# Altium PCB LB - PCB Route Sem a malha de terra.PcbDoc
Units mm, origin at the board's own origin, x right, y up, seen from the top; angles counter-clockwise.
Board outline 38.5 x 63 mm, 2 copper layers (Top Layer, Bottom Layer); 60 components, 39 nets, 188 pads, 49 vias.
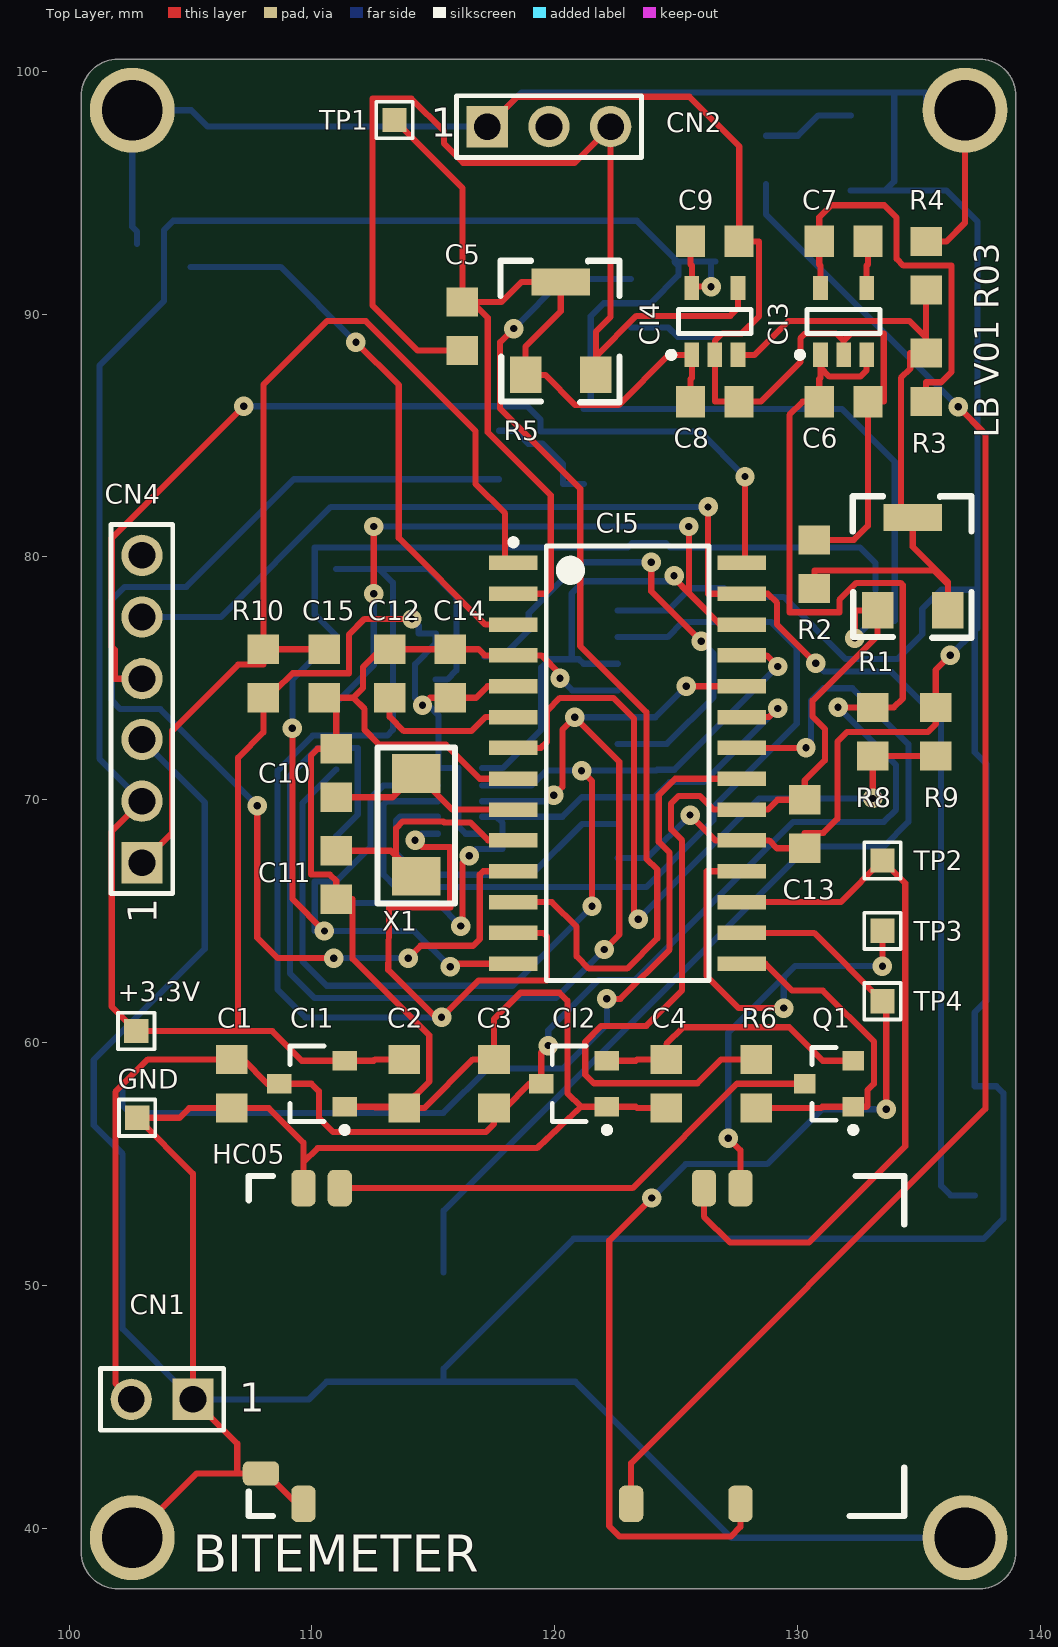
[diagram p0: Top Layer view]
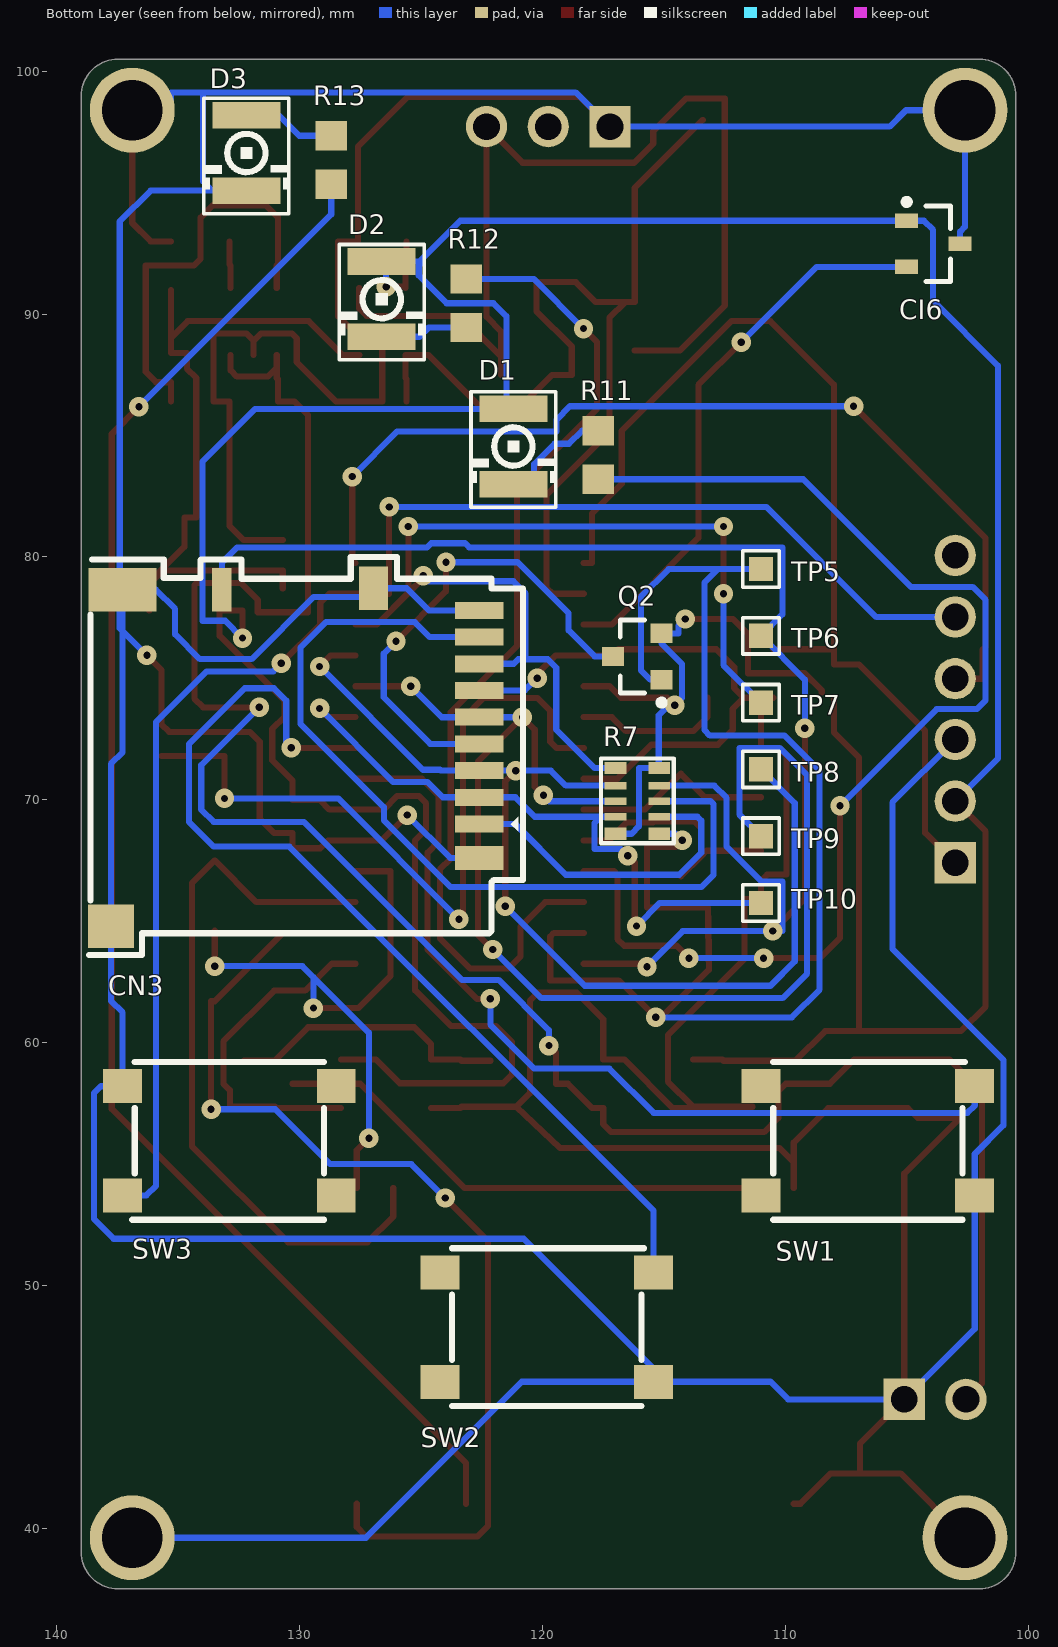
[diagram p1: Bottom Layer view, seen from below]

## Layer stack, top to bottom
Top Solder: solder mask 0.0102, Solder Resist, Dk 3.5
Top Layer: signal copper 0.0356
Dielectric1: dielectric 0.32, FR-4, Dk 4.8
Bottom Layer: signal copper 0.0356
Bottom Solder: solder mask 0.0102, Solder Resist, Dk 3.5

## Board outline
139,99 ccw(c137.5,99) 137.5,100.5 102,100.5 ccw(c102,99) 100.5,99 100.5,39 ccw(c102,39) 102,37.5 137.5,37.5 ccw(c137.5,39) 139,39 139,99

## Design rules (kind name [scope] priority, off if disabled: settings)
Clearance [All] p1: gap=0.254
PolygonConnect [All] p1: connectstyle=Relief reliefconductorwidth=0.254 reliefentries=4 polygonreliefangle="90 Angle" airgapwidth=0.254
RoutingVias [All] p1: holewidth=0.3 width=0.8 viastyle="Through Hole" minholewidth=0.3 minwidth=0.8 maxholewidth=0.3 maxwidth=0.8
SolderMaskExpansion [All] p1: expansion=0.102
UnpouredPolygon [All] p1: allowunpoured=FALSE
Width [All] p1: maxlimit=0.254 minlimit=0.254 preferedwidth=0.254
29 further rules are at their usual default settings.

## Classes and differential pairs
component class "LB - Supply": +3.3V C1 C2 C3 C4 C5 C6 C7 C8 C9 CI1 CI2 CI3 CI4 CN1 CN2 GND R1 R2 R3 R4 R5 TP1
component class "LB - MainBoard": C10 C11 C12 C13 C14 C15 CI5 CI6 CN3 CN4 D1 D2 D3 HC05 Q1 Q2 R6 R7 R8 R9 R10 R11 R12 R13 SW1 SW2 SW3 TP2 TP3 TP4 TP5 TP6 TP7 TP8 TP9 TP10 X1

## Components (designator, comment, footprint, x,y, rotation, side; value= is the part's Value field where it differs from the comment)
+3.3V "TP" TPSMD 102.765,60.469 r90 top
C1 "1uF" R0805 106.7,58.3 r90 top
C2 "1uF" R0805 113.8,58.3 r90 top
C3 "4.7uF" R0805 117.5,58.3 r270 top
C4 "1uF" R0805 124.6,58.3 r90 top
C5 "0.1uF" R0805 116.2,89.5 r270 top
C6 "1uF" R0805 131.9,86.4 r0 top
C7 "4.7uF" R0805 131.9,93 r180 top
C8 "47pF" R0805 126.6,86.4 r180 top
C9 "0.1uF" R0805 126.6,93 r180 top
C10 "22pF" R0805 111,71.1 r90 top (schematic designator C5)
C11 "22pF" R0805 111,66.9 r270 top (schematic designator C6)
C12 "10uF" R0805 113.2,75.2 r270 top (schematic designator C7)
C13 "0.1uF" R0805 130.3,69 r90 top
C14 "0.1uF" R0805 115.7,75.2 r270 top
C15 "0.1uF" R0805 110.5,75.2 r90 top (schematic designator C10)
CI1 "MCP1754S" "SOT23-A MCP1754" 110,58.3 r180 top
CI2 "MCP1754S" "SOT23-A MCP1754" 120.8,58.3 r180 top
CI3 "LP2983AIM5-1.0" "SOT23-5 Amp Op" 131.9,89.7 r90 top
CI4 "MCP6441" "SOT23-5 Amp Op" 126.6,89.7 r90 top
CI5 "PIC18F27J13" PIC24F16KL402 123,71.5 r0 top (schematic designator CI3)
CI6 "MCP9700A" MCP9700A 103.9,92.9 r180 bottom (schematic designator CI4)
CN1 "Header 2" HDR1X2 105.1,45.3 r180 top
CN2 "Header 3" HDR1X3 117.225,97.725 r0 top
CN3 "DM3AT-SF-PEJM5" DM3AT 122.5,69 r270 bottom
CN4 "Header 6" HDR1X6 103,67.4 r90 top
D1 "Red" LTST-C930 121.2,84.55 r180 bottom
D2 "Yellow" LTST-C930 126.624,90.617 r180 bottom
D3 "Blue" LTST-C930 132.199,96.639 r180 bottom
GND "TP" TPSMD 102.8,56.9 r90 top
HC05 "JY-MCU HC-05" "JY-MCU HC-05" 107.9,54 r270 top
Q1 "DMP2305U-7" DMP2305U-7 131.3,58.3 r180 top
Q2 "DMP2305U-7" DMP2305U-7 116.1,75.9 r0 bottom
R1 "200k" 3364X-1-503E 133.3,77.8 r0 top
R2 "470" R0805 130.7,79.7 r90 top
R3 "17.4k" R0805 135.3,87.4 r270 top
R4 "10.0k" R0805 135.3,92 r270 top
R5 "200k" 3364X-1-503E 118.8,87.5 r0 top (schematic designator R3)
R6 "10k" R0805 128.3,58.3 r90 top (schematic designator R1)
R7 "4k7x8 Bus" "MMR15 Mod" 117,68.6 r90 bottom (schematic designator R2)
R8 "17.4k" R0805 133.1,72.8 r90 top (schematic designator R4)
R9 "10.0k" R0805 135.7,72.8 r270 top (schematic designator R5)
R10 "10k" R0805 108,75.2 r270 top
R11 "470" R0805 117.7,84.2 r270 bottom (schematic designator R7)
R12 "470" R0805 123.15,90.45 r90 bottom (schematic designator R8)
R13 "470" R0805 128.7,96.35 r270 bottom (schematic designator R9)
SW1 "" "Push Button2" 102.2,53.7 r0 bottom
SW2 "" "Push Button2" 115.425,46.025 r0 bottom
SW3 "" "Push Button2" 137.3,58.2 r180 bottom
TP1 "TP" TPSMD 113.4,98 r90 top
TP2 "TP" TPSMD 133.5,67.5 r0 top
TP3 "TP" TPSMD 133.5,64.6 r0 top
TP4 "TP" TPSMD 133.5,61.7 r0 top
TP5 "TP" TPSMD 111,79.5 r270 bottom
TP6 "TP" TPSMD 111,76.75 r270 bottom
TP7 "TP" TPSMD 111,74 r270 bottom
TP8 "TP" TPSMD 111,71.25 r270 bottom
TP9 "TP" TPSMD 111,68.5 r270 bottom
TP10 "TP" TPSMD 111,65.75 r270 bottom
X1 "20.000Hz" ABM3 114.3,70.8 r270 top

## Footprints (in the part's own frame and the unit in brackets; to place one, negate y for a bottom-side part, rotate by r counter-clockwise, add the part's x,y. Pads: shape width x height; smd on the part's side, far side on the other; paste and mask are expansions set on the pad)
3364X-1-503E [mm] "Trimpot 50k"
  rect 1.3x1.5 smd: 1(0,0) 3(2.9,0)
  rect 2.4x1.1 smd: 2(1.45,3.825)
  silkscreen extent -1.02,-1.13 3.87,4.7, body extent -1,-1 4.2,5.2, height 1.5
ABM3 [mm] "Crystal 20.000MHz"
  rect 1.6x2 smd: 1(-0.275,0) 2(3.95,0)
  silkscreen extent -1.35,-1.6 5.08,1.6, body extent -1.05,-1.48 4.75,1.48, height 1.3
DM3AT [mm]
  rect 0.7x2 smd: 1(0,-0.1) 2(-1.1,-0.1) 3(-2.2,-0.1) 4(-3.3,-0.1) 5(-4.4,-0.1) 6(-5.5,-0.1) 7(-6.6,-0.1) 8(-7.7,-0.1) 9(-8.8,-0.1)
  rect 1.8x0.8 smd: 10(-9.65,-10.71)
  rect 1.8x1.2 smd: 11(-9.71,-4.47)
  rect 1.8x2.8 smd: 12(-9.65,-14.8)
  rect 1.8x1.9 smd: 13(4.21,-15.28)
  rect 1x2 smd: 14(1.4,-0.1)
  silkscreen extent -11,-16.18 5.4,1.7, body extent -9.71,-16.19 4.14,-0.04, height 1.68
DMP2305U-7 [mm] "SOT23, 3-Leads, Body 2.90x2.45mm, Pitch 0.95mm, IPC Medium Density"
  rect 0.9x0.8 smd: D(1,0) G(-1,0.95) S(-1,-0.95)
  silkscreen extent -1.13,-1.5 0.7,2.02, body extent -0.7,-1.5 0.7,1.5, height 1.1
HDR1X2 [mm] "Connector; Header; 2 Position"
  rect 1.7x1.7 hole 1.1: 1(0,0)
  round 1.7 hole 1.1: 2(2.54,0)
  silkscreen extent -1.27,-1.27 3.81,1.27, body extent -1.27,-3.17 3.81,2.67, height 10.02
HDR1X3 [mm] "Connector; Header; 3 Position"
  rect 1.7x1.7 hole 1.1: 1(0,0)
  round 1.7 hole 1.1: 2(2.54,0) 3(5.08,0)
  silkscreen extent -1.27,-1.27 6.35,1.27, body extent -1.27,-0.34 6.35,10.71, height 5.87
HDR1X6 [mm] "Connector; Header; 6 Position"
  rect 1.7x1.7 hole 1.1: 1(0,0)
  round 1.7 hole 1.1: 2(2.54,0) 3(5.08,0) 4(7.585,0) 5(10.125,0) 6(12.665,0)
  silkscreen extent -1.27,-1.27 13.94,1.27, body extent -1.26,-1.78 13.98,1.78, height 8.64
"JY-MCU HC-05" [mm] "Modulo Bluetooth HC-0x"
  rrect50% 1.5x1 smd: 1(0,19.75) 2(0,18.25) 12(0,3.25) 13(0,1.75) 22(13,1.75) 31(13,15.25) 34(13,19.75)
  rrect50% 1x1.5 smd: 21(11.75,0)
  silkscreen extent -0.5,-0.5 13.5,26.5, body extent 0,0 13,26, height 2
LTST-C930 [mm] "LED LITE-ON LTST-C930"
  rect 2.8x1.1 smd: A(0,1.55) K(0,-1.55)
  silkscreen extent -1.75,-2.5 1.75,2.25, body extent -1.23,-1.54 1.23,1.54, height 2.4
MCP9700A [mm] "Sensor de temperatura"
  rect 0.95x0.6 smd: 1(-1.1,0.95) 2(-1.1,-0.95) 3(1.1,0)
  silkscreen extent -1.23,-1.55 0.7,1.85, body extent -0.7,-1.52 0.7,1.53, height 1.12
"MMR15 Mod" [mm]
  rect 0.5x0.9 smd: 1(0,-1.81) 5(2.705,-1.81) 6(2.705,0) 10(0,0)
  rect 0.32x0.9 smd: 2(0.7,-1.81) 3(1.34,-1.81) 4(1.98,-1.81) 7(1.98,0) 8(1.34,0) 9(0.7,0)
  silkscreen extent -0.39,-2.4 3.1,0.59, body extent 0.03,-1.95 2.73,-0.05, height 0.55
PIC24F16KL402 [mm] "SOIC, 28-Leads, Body 17.90x7.50mm, Pitch 1.27mm, IPC Medium Density"
  rect 2x0.6 smd: 1(-4.7,8.255) 2(-4.7,6.985) 3(-4.7,5.715) 4(-4.7,4.445) 5(-4.7,3.175) 6(-4.7,1.905) 7(-4.7,0.635) 8(-4.7,-0.635) 9(-4.7,-1.905) 10(-4.7,-3.175) 11(-4.7,-4.445) 12(-4.7,-5.715) 13(-4.7,-6.985) 14(-4.7,-8.255) 15(4.7,-8.255) 16(4.7,-6.985) 17(4.7,-5.715) 18(4.7,-4.445) 19(4.7,-3.175) 20(4.7,-1.905) 21(4.7,-0.635) 22(4.7,0.635) 23(4.7,1.905) 24(4.7,3.175) 25(4.7,4.445) 26(4.7,5.715) 27(4.7,6.985) 28(4.7,8.255)
  silkscreen extent -4.82,-8.95 3.35,9.23, body extent -3.75,-8.95 3.75,8.95, height 2.65
"Push Button2" [mm]
  rect 1.6x1.4 smd: 1(0,0) 2(0,-4.5) 3(8.8,0) 4(8.8,-4.5)
  silkscreen extent 0.4,-5.5 8.3,1, body extent -0.6,-5.2 9.4,0.8, height 7.1
R0805 [mm] "Molded Resistor, 2-Leads, Body 2.00x1.25mm, IPC Medium Density"
  rect 1.2x1.3 smd: 1(-1,0) 2(1,0)
  body extent -1.05,-0.63 1.05,0.63, height 0.6
"SOT23-5 Amp Op" [mm] "Amp Op"
  rect 1x0.6 smd: 1(-1.375,0.95) 2(-1.375,0) 3(-1.375,-0.95) 4(1.375,-0.95) 5(1.375,0.95)
  silkscreen extent -1.5,-1.5 0.5,1.92, body extent -0.88,-1.5 0.87,1.5, height 1.45
"SOT23-A MCP1754" [mm] "MCP1754"
  rect 1x0.8 smd: 1(-1.35,0.95) 2(-1.35,-0.95) 3(1.35,0)
  silkscreen extent -1.48,-1.55 0.9,2.02, body extent -0.9,-1.55 0.9,1.55, height 1.1
TPSMD [mm] "Test Point SMD"
  rect 1x1 smd: 1(0,0)
  silkscreen extent -0.75,-0.75 0.75,0.75

## Part data
+3.3V GND TP1 TP2 TP3 TP4 TP5 TP6 TP7 TP8 TP9 TP10: "Test Point"
C1 C3 C7: library part C, "Capictor Cerâmico 4.7uFx16V"
C2 C4 C6: library part C, "Capictor Cerâmico 1uFx16V"
C5 C8 C9 C13 C14 C15: library part C, "Capacitor 0.1uFx25V"
C10 C11: library part C, "Capacitor 22pF"
C12: library part C, "Capacitor 10uFx6.3V"
CI1 CI2: library part "Regulador 3.3V - SOT223-3, 4-Leads, Body 6.50x7.00mm (avg), Pitch 2.30mm, IPC Medium_1", "Regulador 3.3V MCP1754S"
CI3: library part "Regulador 1.0V - SOT23-5", "Regulador 1.0V"
CI4: library part "Amp Op", "Amp Op Rail-to-Rail"
CI5: "PIC18 8Bits"
CI6: "Sensor de temperatura"
CN1: library part "Conector Alimentação", "Header, 2-Pin"
CN2: library part "Conector Sensor", "Header, 3-Pin"
CN3: library part "MicroSD - DM3CS-SF", "Slot Micro SD - Push-Pull"
CN4: library part "Conector Programação", "Header, 6-Pin"
D1 D2 D3: library part LED, "LED"
HC05: "Modulo Bluetooth HC-05"
Q1 Q2: library part "MOSFET-P DIODE", "MOSFET-P"
R1 R5: library part Trimpot, "Trimpot 200k"
R2 R3 R4 R6 R8 R9 R10 R11 R12 R13: library part R
R7: library part "R ARRAY BUS 8 - 10 PIN", "Brigde 4k7x8"
SW1 SW2 SW3: library part "Push button", "Push Button"
X1: library part XTAL, "Crystal 20.000Hz"

## Free pads (board coordinates)
  round 3.5 hole 2.5: 1(102.6,98.4) 2(136.9,98.4) 3(102.6,39.6) 3(136.9,39.6)

## Via types
v1: diameter 0.8, hole 0.3, Top Layer to Bottom Layer, 49 vias

## Nets (pads, with @x,y where several pads share a name; then routed paths per layer and width w, separated by ;. In a path a pad name is that pad's centre, name@x,y a point inside that pad or via, vN(x,y) a via of type N, cw(c..) or ccw(c..) an arc to the next point about the centre after c; other vN are vias at no path point)
+3.3VCC: +3.3V.1 C2.2 C9.2 C13.2 C14.2 CI1.2 CI4.5 CI5.5 CI5.20 CI6.1 CN4.2 D1.A D2.A Q2.S R1.1 R6.2 R7.5 R7.10 R10.2 | length 183.3
  Top Layer w0.254: CN4.2 101.752,68.692 101.752,61.482 +3.3V.1 108.365,60.469 109.584,59.25 CI1.2 112.547,59.25 112.597,59.3 C2.2 ; 106.959,60.528 106.959,71.73 108,72.771 R10.2 ; R10.2@108.5,74.412 108.5,74.5 109.209,75.209 111.531,75.209 111.531,76.81 112.166,77.445 v1(114.122,77.445) ; v1(114.554,73.889) 114.865,74.2 C14.2 116.764,74.2 117.239,74.675 CI5.5 ; C9.2 125.6,92.049 125.65,91.999 CI4.5@125.65,91.135 ; CI4.5 CI4.5@125.65,91.135 ; v1(126.441,91.135) CI4.5@125.65,91.135 ; R6.2 126.864,59.3 125.882,58.318 121.615,58.318 121.26,58.674 121.26,60.02 121.92,60.681 123.774,60.681 125.247,62.154 125.247,68.326 124.797,68.777 124.797,69.85 125.101,70.155 125.983,70.155 126.543,69.595 CI5.20 128.778,69.595 129.183,70 C13.2 130.3,70.794 131.134,71.628 131.134,72.917 130.626,73.425 130.626,74.081 133.3,76.755 R1.1 132.359,77.8 v1(132.359,76.657)
  Bottom Layer w0.254: CN4.2 101.244,71.696 101.244,87.884 103.911,90.551 103.911,93.472 104.289,93.85 CI6.1 123.387,93.85 125.07,92.167 ; v1(114.122,77.445) 114.402,77.165 114.402,76.85 Q2.S 115.1,76.441 114.249,75.59 114.249,74.193 v1(114.554,73.889) 114.808,73.889 115.214,73.482 R7.5@115.214,71.305 ; R7.5 R7.5@115.214,71.305 ; R7.10 116.332,68.6 116.027,68.905 116.027,71.305 R7.5@115.214,71.305 ; D1.A D1.A@121.488,86.1 ; v1(126.441,91.135) D2.A@126.441,92.167 ; D2.A D2.A@126.441,92.167 ; v1(132.359,76.657) 133.071,77.369 134.01,77.369 134.01,83.922 131.832,86.1 D1.A@121.488,86.1 ; D1.A@121.488,86.1 121.488,89.916 122.022,90.449 123.952,90.449 125.1,91.597 125.1,92 124.933,92.167 125.07,92.167 ; 125.07,92.167 D2.A@126.441,92.167
"+3.3VCC BT": C4.2 CI2.2 Q1.S | length 11.7
  Top Layer w0.254: CI2.2 123.342,59.25 123.392,59.3 C4.2 124.6,59.944 125.286,60.63 129.66,60.63 131.04,59.25 Q1.S
GND: C1.1 C2.1 C3.1 C4.1 C6.2 C8.1 C9.1 C10.2 C11.2 C12.1 C13.1 C14.1 C15.1 CI1.1 CI2.1 CI3.2 CI4.2 CI5.4 CI5.8 CI5.19 CI6.3 CN1.1 CN2.1 CN3.6 CN3.9 CN3.11 CN3.12 CN3.13 CN3.14 CN4.3 D3.K GND.1 HC05.13 HC05.21 HC05.22 pad.1 pad.2 pad.3 R2.2 R4.1 R9.1 SW1.1 SW2.1 SW3.1 | length 394.8
  Top Layer w0.254: pad.3@102.6,39.6 105.25,42.25 106.924,42.25 ; HC05.22 109.378,41 108.128,42.25 HC05.21 106.924,42.25 ; HC05.13 109.65,55.065 ; C15.1 C15.1@111,74.2 ; CN2.1 118.458,98.958 125.552,98.958 127.6,96.911 C9.1 128.422,93 128.422,89.916 127.712,89.206 126.906,89.206 126.6,88.9 CI4.2 126.6,86.4 C8.1 128.499,86.4 130.124,88.026 130.124,89.002 130.329,89.206 131.594,89.206 131.9,88.9 ; CI5.8 116.916,70.865 115.518,72.263 112.776,72.263 112.166,72.873 112.166,73.738 111.705,74.2 ; v1(120.218,75.008) 120.218,75.184 119.457,75.945 CI5.4 117.12,75.945 116.865,76.2 C14.1 C12.1 112.846,76.2 112.102,75.457 112.102,74.598 111.705,74.2 ; C4.1 123.392,57.3 123.342,57.35 CI2.1 121.085,57.35 ; v1(125.578,69.367) 126.62,68.325 CI5.19 128.829,68.325 129.154,68 C13.1 130.3,68.631 131.064,68.631 131.648,69.215 131.648,72.39 132.055,72.796 135.382,72.796 135.7,73.114 R9.1 135.7,75.35 v1(136.296,75.946) ; R2.2 132.32,80.7 132.9,81.28 C6.2 133.553,86.4 133.553,89.206 132.206,89.206 131.9,88.9 ; CI3.2 131.9,88.9 ; R4.1 136.144,93 136.9,93.756 pad.2 ; 106.924,42.25 106.924,43.476 CN1.1 105.1,54.6 GND.1 104.546,56.9 104.946,57.3 C1.1 108.23,57.3 109.65,55.88 109.65,55.065 ; 109.65,55.065 110.236,55.651 119.278,55.651 121.085,57.35 ; C15.1@111,74.2 C10.2 110.236,72.1 109.957,71.821 109.957,66.916 110.744,66.916 111,66.66 C11.2 111.677,65.9 111.677,63.452 114.833,60.296 114.833,58.391 113.792,57.35 CI1.1 113.792,57.3 C2.1 114.63,57.3 116.63,59.3 C3.1 117.5,60.96 118.592,62.052 120.193,62.052 120.523,61.722 120.523,57.912 121.085,57.35 ; C15.1@111,74.2 111.705,74.2
  Bottom Layer w0.254: CI6.3 102.8,93.399 102.6,93.599 pad.1 105.029,98.4 105.704,97.725 CN2.1 118.636,99.136 133.985,99.136 ; CN4.3 105.588,69.892 105.588,63.856 101.016,59.284 101.016,56.591 102.2,55.407 SW1.1 102.2,48.2 CN1.1 109.88,45.3 110.605,46.025 SW2.1 ; v1(120.218,75.008) 120.726,74.5 CN3.6 ; CN3.14 123.81,67.6 v1(125.578,69.367) ; CN3.9 124.682,77.8 125.592,78.71 CN3.11 126.97,78.352 129.426,78.352 131.986,75.793 134.112,75.793 135.138,76.819 135.138,77.861 135.927,78.65 CN3.12 137.3,76.95 ; D3.K 133.604,95.089 ; v1(136.296,75.946) 137.3,76.95 ; pad.3@136.9,39.6 127.278,39.6 120.853,46.025 SW2.1 ; pad.2 135.306,98.4 135.306,99.136 133.985,99.136 ; SW2.1 115.425,46.566 120.777,51.918 137.668,51.918 138.481,52.731 138.481,57.912 138.193,58.2 SW3.1 137.3,61.239 137.78,61.719 CN3.13 137.78,71.476 137.3,71.956 137.3,76.95 ; 133.604,95.089 133.985,95.47 133.985,99.136 ; 133.604,95.089 136.144,95.089 137.414,93.819 137.414,77.064 137.3,76.95
LED_BT: HC05.31 R13.2 | length 64.1
  Top Layer w0.254: HC05.31 123.15,42.672 137.744,57.266 137.744,85.065 v1(136.627,86.182)
  Bottom Layer w0.254: R13.2 128.7,94.109 v1(136.627,86.182)
LED_POWER: CI5.11 R11.2 | length 49.3
  Top Layer w0.254: v1(107.747,69.748) 107.747,64.313 108.586,63.475 v1(110.896,63.475) ; v1(113.97,63.475) 114.478,63.983 116.637,63.983 116.916,64.262 116.916,66.915 117.056,67.055 CI5.11
  Bottom Layer w0.254: v1(107.747,69.748) 103.759,73.736 102.108,73.736 101.752,74.092 101.752,78.232 102.286,78.765 104.826,78.765 109.26,83.2 R11.2 ; v1(110.896,63.475) v1(113.97,63.475)
LED_STATUS: CI5.12 R12.2 | length 42
  Top Layer w0.254: CI5.12 119.888,65.785 120.904,64.769 120.904,63.551 121.412,63.043 122.98,63.043 124.225,64.287 124.225,67.126 123.781,67.57 123.781,73.603 121.056,76.327 121.056,82.808 117.754,86.11 117.754,88.849 v1(118.313,89.408)
  Bottom Layer w0.254: v1(118.313,89.408) 120.355,91.45 R12.2
M\C\L\R\: C15.2 CI5.1 CN4.1 R10.1 | length 42.9
  Top Layer w0.254: CN4.1 104.242,68.642 104.242,72.847 106.959,75.565 108,75.565 R10.1 ; C15.2 R10.1 ; CI5.1 117.958,79.755 117.958,81.795 116.738,83.014 116.738,85.192 112.217,89.713 110.617,89.713 108,87.096 R10.1
NetC1_2: C1.2 C3.2 C6.1 CI1.3 CI2.3 CI3.1 CI3.3 CN1.2 R8.2 | length 87.1
  Top Layer w0.254: CN1.2 101.905,45.955 101.905,57.963 103.242,59.3 C1.2 107.163,59.3 108.163,58.3 CI1.3 109.982,58.3 110.287,57.995 110.287,56.896 110.871,56.312 117.17,56.312 117.5,56.642 C3.2 117.958,57.3 118.958,58.3 CI2.3 119.45,59.589 v1(119.736,59.874) ; CI3.1 130.95,87.799 ; v1(131.674,73.812) 131.686,73.8 R8.2 133.973,73.8 134.341,74.168 134.341,78.842 134.251,78.931 132.43,78.931 131.731,78.232 131.731,77.719 129.667,77.719 129.667,85.852 130.215,86.4 C6.1 130.9,87.325 130.95,87.375 130.95,87.799 ; CI3.3 132.85,87.693 132.588,87.431 131.318,87.431 130.95,87.799
  Bottom Layer w0.254: v1(119.736,59.874) 119.736,60.503 121.812,62.579 123.319,62.579 129.828,69.088 133.553,69.088 134.061,69.596 134.061,71.425 v1(131.674,73.812)
NetC5_2: C5.2 CI4.4 CN2.3 R5.3 | length 42.8
  Top Layer w0.254: C5.2 114.351,88.5 112.497,90.354 112.497,98.882 114.097,98.882 115.443,97.536 115.443,97.028 116.23,96.241 120.821,96.241 CN2.3 122.305,89.886 121.7,89.281 121.7,88.255 ; R5.3 121.7,88.255 ; CI4.4 127.55,90.237 127.238,89.925 123.37,89.925 121.7,88.255
NetC7_1: C7.1 CI3.4 | length 1.9
  Top Layer w0.254: CI3.4 132.85,91.999 132.9,92.049 C7.1
NetC7_2: C7.2 CI3.5 R3.2 | length 17
  Top Layer w0.254: CI3.5 130.95,91.999 130.9,92.049 C7.2 130.9,93.994 131.394,94.488 133.579,94.488 134.087,93.98 134.087,92.278 134.366,91.999 136.347,91.999 136.347,87.63 135.915,87.198 135.3,87.198 R3.2
NetC10_1: C10.1 CI5.9 X1.1 | length 8.3
  Top Layer w0.254: C10.1 113.325,70.1 X1.1 115.78,69.595 CI5.9
NetC11_1: C11.1 CI5.10 X1.2 | length 10.2
  Top Layer w0.254: C11.1 113.25,67.9 113.468,67.682 ; X1.2 113.468,67.682 ; CI5.10 117.259,68.325 116.521,69.063 115.451,69.063 115.407,69.107 113.741,69.107 113.468,68.834 113.468,67.682
NetC12_2: C12.2 CI5.6 | length 6.4
  Top Layer w0.254: C12.2 113.2,73.419 113.792,72.827 116.566,72.827 117.144,73.405 CI5.6
NetCI5_13: CI5.13 Q2.G R7.1 TP5.1 | length 59.2
  Top Layer w0.254: v1(114.249,68.326) 114.529,68.047 115.697,68.047 115.697,65.557 113.182,65.557 113.174,64.916 113.156,63.633 113.147,62.992 v1@115.103,61.036 ; v1(115.341,61.036) 116.865,62.56 119.685,62.56 119.685,64.364 119.533,64.515 CI5.13
  Bottom Layer w0.254: TP5.1 112.776,79.5 ; v1(114.249,68.326) 114.523,68.6 R7.1 ; Q2.G 115.57,74.95 115.951,75.331 115.951,78.357 114.808,79.5 112.776,79.5 ; v1(115.341,61.036) 109.728,61.036 108.585,62.179 108.585,71.198 110.031,72.644 113.106,72.644 113.335,72.873 113.335,78.941 112.776,79.5
NetCI5_14: CI5.14 CN3.10 R7.4 TP6.1 | length 60.8
  Top Layer w0.254: v1(109.195,72.949) 109.195,65.913 v1(110.515,64.592) ; v1(115.697,63.119) 115.823,63.245 CI5.14
  Bottom Layer w0.254: v1(109.195,72.949) 109.195,74.945 TP6.1 110.119,77.631 110.119,80.391 123.019,80.391 123.19,80.562 124.581,80.562 124.752,80.391 132.575,80.391 133.21,79.756 CN3.10 ; R7.4 112.928,70.58 112.42,70.072 112.42,68.072 110.979,66.631 110.119,66.631 110.119,64.592 114.224,64.592 v1(115.697,63.119)
NetCI5_15: CI5.15 Q1.G R6.1 | length 14.2
  Top Layer w0.254: CI5.15 128.677,63.245 129.781,62.141 131.051,62.141 133.147,60.046 133.147,58.299 132.88,58.032 132.88,57.388 132.842,57.35 Q1.G 131.02,57.35 130.97,57.3 R6.1
NetCI5_16: CI5.16 HC05.34 TP4.1 | length 43.7
  Top Layer w0.254: v1(124.003,53.594) 122.25,51.841 122.25,40.081 122.682,39.649 127.254,39.649 127.65,40.045 HC05.34 ; CI5.16 130.685,64.515 TP4.1 133.655,61.7 v1(133.655,57.252)
  Bottom Layer w0.254: v1(124.003,53.594) 125.4,54.991 128.753,54.991 131.013,57.252 v1(133.655,57.252)
NetCI5_17: CI5.17 HC05.2 TP2.1 | length 30.2
  Top Layer w0.254: HC05.2 126.15,52.832 127.217,51.765 130.48,51.765 134.442,55.728 134.442,66.558 TP2.1 131.785,65.785 CI5.17
NetCI5_18: CI5.18 HC05.1 TP3.1 | length 28.2
  Top Layer w0.254: v1(127.152,56.058) 127.65,55.56 HC05.1 ; CI5.18 126.263,67.055 126.263,62.738 127.584,61.417 v1(129.438,61.417) ; v1(133.5,63.144) TP3.1
  Bottom Layer w0.254: v1(127.152,56.058) 127.152,60.401 129.896,63.144 ; v1(129.438,61.417) 129.438,62.687 129.896,63.144 ; 131.166,63.144 129.896,63.144 ; v1(133.5,63.144) 129.896,63.144
NetCI5_21: CI5.21 SW1.2 | length 37.1
  Top Layer w0.254: v1(122.149,61.798) 122.703,61.798 124.733,63.828 124.733,67.818 124.289,68.262 124.289,70.186 124.968,70.865 CI5.21
  Bottom Layer w0.254: SW1.2 102.2,57.404 102.505,57.099 115.418,57.099 117.246,58.928 120.339,58.928 122.149,60.738 v1(122.149,61.798)
NetCI5_22: CI5.22 SW2.2 | length 41.4
  Top Layer w0.254: CI5.22 v1(130.353,72.136) v1(130.353,72.136)
  Bottom Layer w0.254: SW2.2 115.425,53.069 130.428,68.072 133.553,68.072 134.569,69.088 134.569,72.288 132.264,74.593 131.064,74.593 130.556,74.085 130.556,72.339 v1(130.353,72.136)
NetCI5_23: CI5.23 CN3.2 R7.9 TP10.1 | length 27.2
  Top Layer w0.254: v1(116.129,64.795) 116.129,64.973 116.205,65.049 116.205,67.412 v1(116.484,67.691) ; CI5.23 128.828,73.405 v1(129.184,73.762)
  Bottom Layer w0.254: TP10.1 115.174,65.75 v1(116.129,64.795) ; v1(116.484,67.691) 116.762,67.969 117.856,67.969 117.856,69.046 117.602,69.3 ; R7.9 117.602,69.3 ; v1(129.184,73.762) 126.148,70.725 124.733,70.725 124.108,70.1 CN3.2 121.12,70.1 120.32,69.3 117.602,69.3
NetCI5_24: CI5.24 CN3.5 R7.8 TP9.1 | length 54.2
  Top Layer w0.254: v1(119.964,70.18) 120.32,70.536 120.32,72.892 v1(120.828,73.4) 122.663,71.565 122.663,64.446 v1(122.047,63.83) ; v1(125.424,74.675) CI5.24
  Bottom Layer w0.254: TP9.1 111.887,69.387 111.887,72.131 110.236,72.131 109.103,70.998 109.103,62.838 110.111,61.83 120.047,61.83 v1(122.047,63.83) ; R7.8 119.724,69.94 v1(119.964,70.18) ; v1(120.828,73.4) CN3.5 124.149,73.4 v1(125.424,74.675)
NetCI5_25: CI5.25 CN3.3 R7.7 TP8.1 | length 43.8
  Top Layer w0.254: v1(121.107,71.196) 121.539,70.764 v1(121.539,65.613) ; CI5.25 128.728,75.945 v1(129.184,75.489)
  Bottom Layer w0.254: TP8.1 109.611,69.861 109.611,63.337 110.61,62.338 118.264,62.338 v1(121.539,65.613) ; R7.7 119.037,70.58 119.657,71.2 v1@121.111,71.2 ; v1(121.107,71.196) v1@121.111,71.2 ; v1(129.184,75.489) 124.929,71.233 124.225,71.233 124.192,71.2 CN3.3 v1@121.111,71.2
NetCI5_26: CI5.26 CN3.7 R7.6 TP7.1 | length 43.5
  Top Layer w0.254: v1(112.547,78.486) v1(112.547,81.255) ; v1(124.917,79.223) 124.917,79.125 125.527,78.515 ; v1(125.527,81.255) 125.527,78.515 ; CI5.26 126.827,77.215 125.527,78.515
  Bottom Layer w0.254: TP7.1 112.547,75.547 v1(112.547,78.486) ; v1(112.547,81.255) v1(125.527,81.255) ; R7.6 117.856,71.305 119.437,72.886 119.437,75.438 119.788,75.789 120.7,75.789 ; CN3.7 121.188,75.6 120.999,75.789 120.7,75.789 ; v1(124.917,79.223) 124.695,79 121.2,79 120.7,78.5 120.7,75.789
NetCN3_1: CN3.1 R7.2 | length 13.5
  Bottom Layer w0.254: R7.2 113.623,69.3 113.462,69.139 113.462,67.818 114.37,66.91 119.043,66.91 121.133,69 CN3.1
NetCN3_4: CN3.4 Q2.D | length 20.3
  Top Layer w0.254: v1(123.977,79.781) 123.977,78.588 v1(126.035,76.53)
  Bottom Layer w0.254: Q2.D 117.856,75.9 118.929,76.973 118.929,77.68 121.031,79.781 v1(123.977,79.781) ; CN3.4 124.624,72.3 126.543,74.219 126.543,76.022 v1(126.035,76.53)
NetCN3_8: CN3.8 R7.3 | length 36.7
  Bottom Layer w0.254: R7.3 113.081,69.94 112.954,69.813 112.954,66.904 113.455,66.402 123.781,66.402 126.534,69.156 126.534,69.689 129.972,73.127 129.972,76.268 128.925,77.315 125.265,77.315 124.65,76.7 CN3.8
NetD1_K: D1.K R11.1 | length 4.9
  Bottom Layer w0.254: R11.1 118.372,85.2 118.911,84.661 119.504,84.661 120.345,83.82 120.345,83 D1.K
NetD2_K: D2.K R12.1 | length 3.6
  Bottom Layer w0.254: R12.1 124.689,89.45 125.072,89.067 D2.K
NetD3_A: D3.A R13.1 | length 3.8
  Bottom Layer w0.254: R13.1 130.023,97.35 130.861,98.189 D3.A
NetHC05_12: HC05.12 Q1.D | length 20.9
  Top Layer w0.254: HC05.12 123.208,54 127.508,58.3 Q1.D
PGC: CI5.27 CN4.5 SW3.2 | length 61.7
  Top Layer w0.254: v1(126.319,82.061) 126.319,78.485 CI5.27 128.778,78.485 129.159,78.104 129.159,77.216 v1(130.759,75.616)
  Bottom Layer w0.254: CN4.5 106.247,77.525 110.783,82.061 v1(126.319,82.061) ; v1(130.759,75.616) 131.09,75.285 133.833,75.285 135.915,73.203 135.915,54.102 136.317,53.7 SW3.2
PGD: CI5.28 CN4.4 | length 40.5
  Top Layer w0.254: CN4.4 101.879,74.985 101.879,76.175 101.752,76.302 101.752,80.772 v1(107.188,86.208) ; CI5.28 127.838,79.755 v1(127.838,83.312)
  Bottom Layer w0.254: v1(107.188,86.208) 118.872,86.208 119.419,85.661 119.419,85.169 125.981,85.169 v1(127.838,83.312)
POWER_REF: CI5.7 R8.1 R9.2 | length 31.3
  Top Layer w0.254: CI5.7 119.43,72.135 119.685,72.39 119.685,73.66 120.218,74.193 122.422,74.193 123.273,73.342 123.273,65.251 v1(123.444,65.079) ; v1(133.1,70.053) R8.1 R9.2
  Bottom Layer w0.254: v1(123.444,65.079) 128.418,70.053 v1(133.1,70.053)
SENSOR_MORD: C5.1 C8.2 CI4.1 CI5.2 R5.1 R5.2 TP1.1 | length 42.8
  Top Layer w0.254: TP1.1 116.2,95.2 C5.1 ; CI5.2 119.582,78.485 119.837,78.74 119.837,82.544 117.246,85.134 117.246,89.854 116.6,90.5 C5.1 ; C8.2 125.6,87.325 125.65,87.375 CI4.1 124.698,88.325 122.631,86.258 120.85,86.258 119.609,87.5 R5.1 118.8,88.671 120.25,90.121 R5.2 118.63,91.325 117.805,90.5 C5.1
SENSOR_TEMP: CI5.3 CI6.2 | length 23.1
  Top Layer w0.254: v1(111.813,88.849) 113.578,87.084 113.578,80.782 117.146,77.215 CI5.3
  Bottom Layer w0.254: CI6.2 108.712,91.95 v1(111.813,88.849)
VREF: CI4.3 R1.2 R1.3 R2.1 R3.1 R4.2 | length 30.2
  Top Layer w0.254: CI4.3 127.55,88.316 128.23,88.316 129.628,89.714 134.62,89.714 135.3,89.034 ; R2.1 130.7,79.439 135.636,79.439 136.2,78.875 ; R4.2 135.3,89.034 ; R1.3 136.2,78.875 ; 135.3,89.034 R3.1 134.645,88.4 134.645,87.757 134.264,87.376 134.264,81.625 R1.2 134.75,80.419 136.2,78.969 136.2,78.875
pads on no net: CN2.2 CN4.6 SW1.3 SW1.4 SW2.3 SW2.4 SW3.3 SW3.4

## Silkscreen, mask and mechanical layers (free items; w line width, h text height)
Top Overlay:
  text "LB V01 R03" at 138.3,84.9 h1 r90
  text "BITEMETER" at 105.1,38.2 h1.52
Mecanico:
  lines w0.254: 100.5,38.777 ccw(c101.77,38.777) 101.77,37.507 101.853,37.507 137.486,37.507 cw(c137.486,37.493) 137.5,37.493 137.723,37.493 ccw(c137.723,38.763) 138.993,38.763 138.993,38.853 138.993,99.147 138.993,99.223 ccw(c137.723,99.223) 137.723,100.493 137.647,100.493 101.853,100.493 101.77,100.493 ccw(c101.77,99.223) 100.5,99.223 100.5,99 100.5,39.254 100.5,38.777

## Dimensions
100.5,39 to 119.75,27.75 on Mecanico
100.5,99 to 119.75,108.75 on Mecanico
137.5,100.5 to 137.5,37.493 on Mecanico
100.493,99 to 139,99 on Mecanico

## Text inside footprints (layer, text, board x,y; h text height)
CN1: Top Overlay "1" at 107,44.8 h1.2
CN2: Top Overlay "1" at 114.9,97.3 h1.2
CN4: Top Overlay "1" at 103.6,64.9 h1.2 r90